# EAGLE board pcb (EAGLE 9.7.0), part 1 of 2
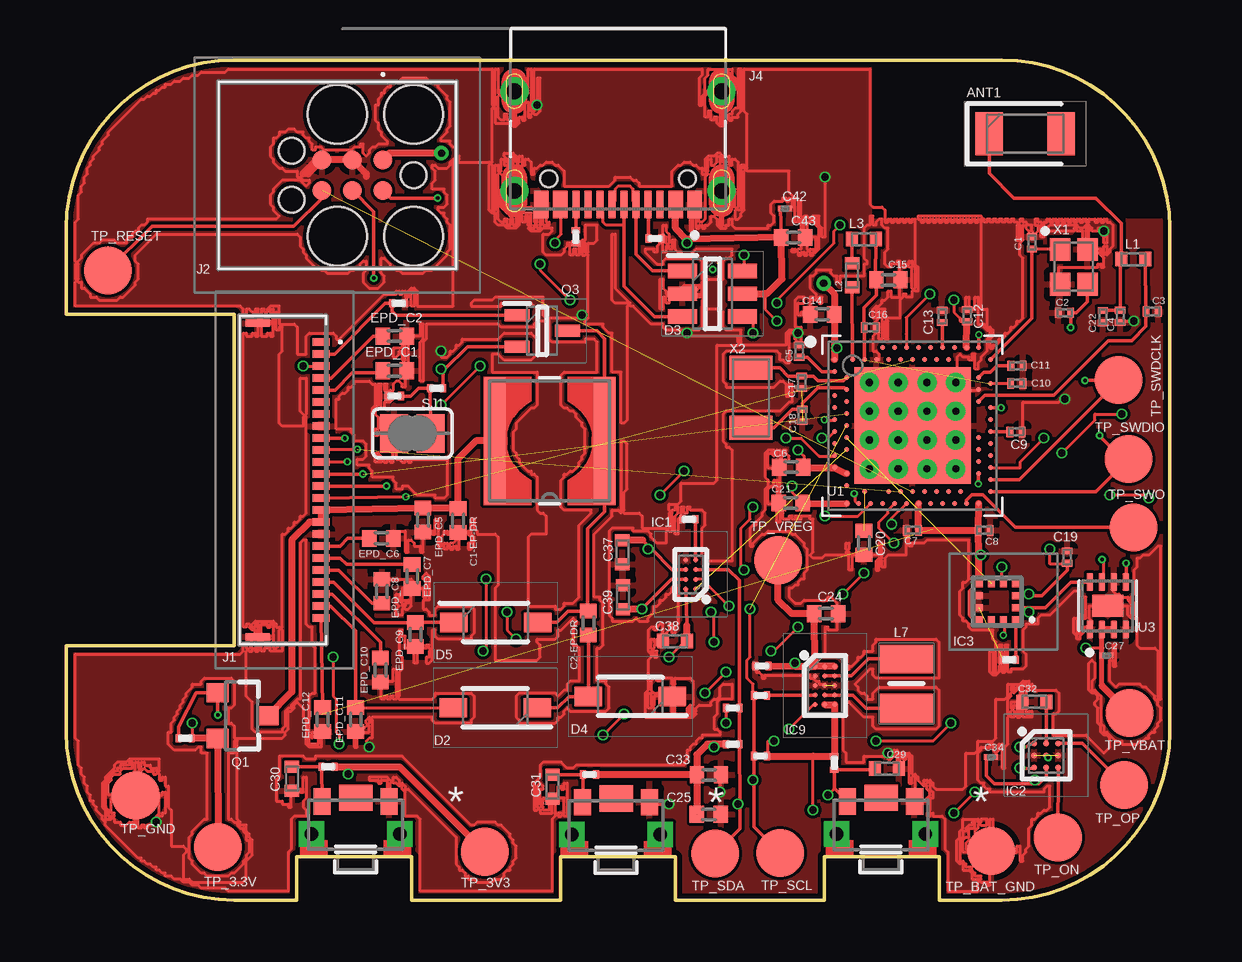
[diagram p0: board, top side]
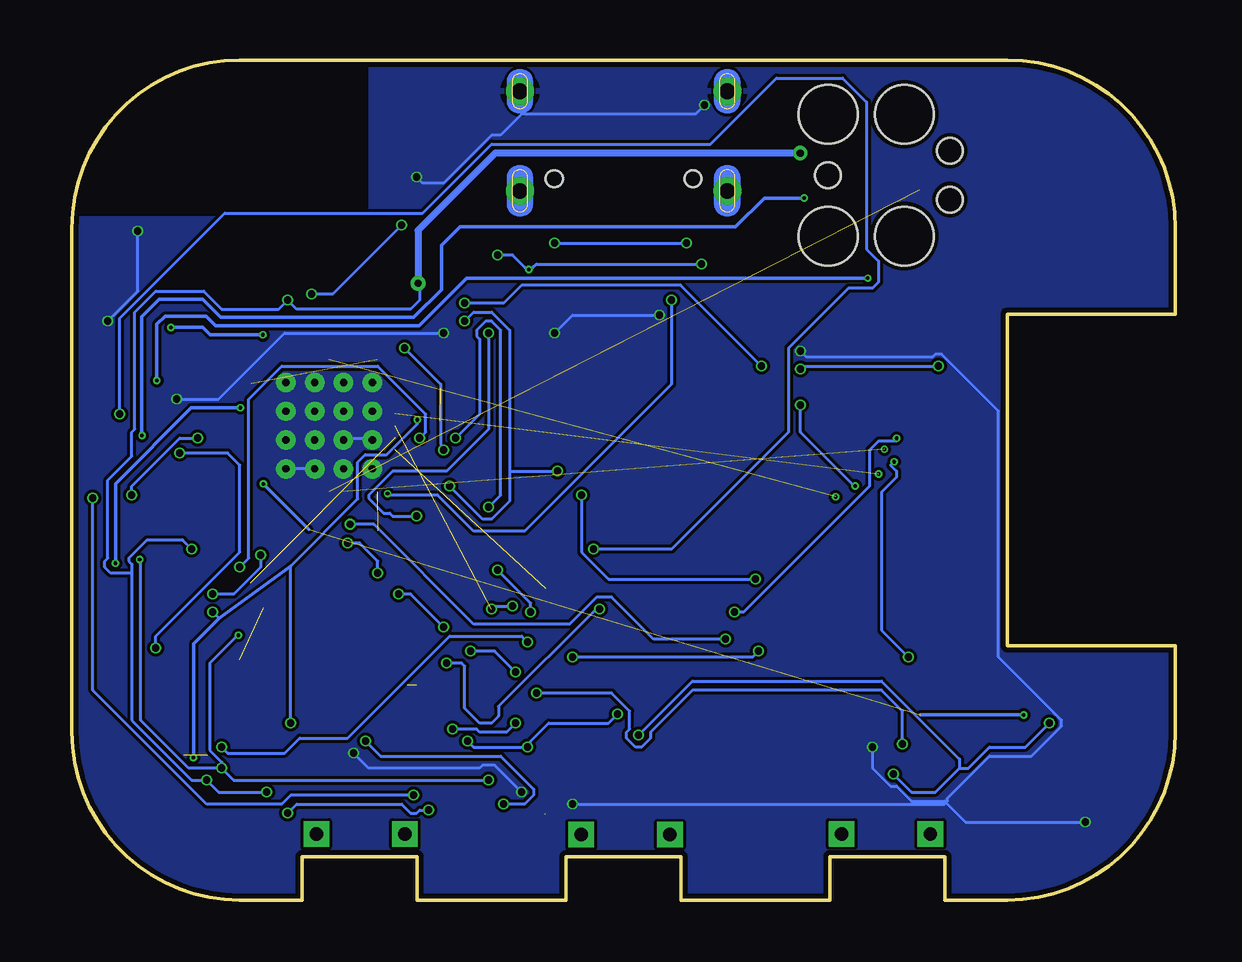
[diagram p1: board, bottom side, seen from below]

Size 46 x 35 mm. Coordinates in mm from the lower left corner, seen from the top.
Outline: 39,0 36.4,0 36.4,1.8 31.6,1.8 31.6,0 25.4,0 25.4,1.8 20.6,1.8 20.6,0 14.4,0 14.4,1.8 9.6,1.8 9.6,0 7,0 arc-90 0,7 0,10.6 7,10.6 7,24.4 0,24.4 0,28 arc-90 7,35 39,35 arc-90 46,28 46,7 arc-90 39,0
Copper layers (1*16): Top 0.035mm / dielectric 1.6mm / Bottom 0.035mm
Design rules "jlcpcb-2layers.dru": minimum track width 5mil, minimum drill 0.3mm, track to track 5mil, track to pad 5mil, pad to pad 5mil, via to via 5mil, smd to smd 5mil, copper to edge 0.2mm, drill to drill 6mil, minimum pad ring 10mil, minimum via ring 3mil, stop-mask expansion 4mil, vias tented up to drill 0mil, thermal gap 10mil

## Footprints (pad centres in the part's own frame; a part is rotated, then mirrored left to right if it is on the bottom)
2450AT18B100E_ANTC3216X140N = smd 1.15 x 1.8: 1 -1.5,0; 2 1.5,0
NORDIC_NRF_3_RESC0201_L = smd 0.28 x 0.43: 1 -0.255,0; 2 0.255,0
PERFECT_0402_0402 = smd 0.6 x 0.7: 1 -0.5,0; 2 0.5,0
GRM011R60J152KE01L_1_0201 = smd 0.35 x 0.25: 1 0,0.275; 2 0,-0.275
GRM011R60J152KE01L_2_CAPC0201X13N = smd 0.22 x 0.23: 1 -0.185,0; 2 0.185,0
NORDIC_NRF_3_RESC0402_L = smd 0.5 x 0.6: 1 -0.5,0; 2 0.5,0
ESP32_C6_LIBRARY_5_SOD3716X135N = smd 1.15 x 0.8: 1 -1.75,0; 2 1.75,0
ESP32_C6_LIBRARY_3_SOT95P280X145-6N = smd 1.2 x 0.6: 1 -1.25,0.95; 2 -1.25,0; 3 -1.25,-0.95; 4 1.25,-0.95; 5 1.25,0; 6 1.25,0.95
BQ25180YBGR_BGA8C40P2X4_100X155X50 = smd 0.2 x 0.2: A1 -0.2,0.6; A2 0.2,0.6; B1 -0.2,0.2; B2 0.2,0.2; C1 -0.2,-0.2; C2 0.2,-0.2; D1 -0.2,-0.6; D2 0.2,-0.6
DRV2605YZFR_BGA9C50P3X3_144X144X62 = smd 0.25 x 0.25: A1 -0.5,0.5; A2 0,0.5; A3 0.5,0.5; B1 -0.5,0; B2 0,0; B3 0.5,0; C1 -0.5,-0.5; C2 0,-0.5; C3 0.5,-0.5
BMA423_BMA423 = smd 0.3 x 0.35: 1 -0.75,-0.775; 2 -0.25,-0.775; 3 0.25,-0.775; 4 0.75,-0.775; 7 0.75,0.775; 8 0.25,0.775; 9 -0.25,0.775; 10 -0.75,0.775 | smd 0.35 x 0.3: 5 0.775,-0.25; 6 0.775,0.25; 11 -0.775,0.25; 12 -0.775,-0.25
RT6160AWSC_BGA15C40P3X5_140X230X60 = smd 0.216 x 0.216: A1 -0.4,0.8; A2 0,0.8; A3 0.4,0.8; B1 -0.4,0.4; B2 0,0.4; B3 0.4,0.4; C1 -0.4,0; C2 0,0; C3 0.4,0; D1 -0.4,-0.4; D2 0,-0.4; D3 0.4,-0.4; E1 -0.4,-0.8; E2 0,-0.8; E3 0.4,-0.8
503480-2400_5034802400 = smd 0.3 x 0.7: 1 -5.75,1.525; 2 -5.25,1.525; 3 -4.75,1.525; 4 -4.25,1.525; 5 -3.75,1.525; 6 -3.25,1.525; 7 -2.75,1.525; 8 -2.25,1.525; 9 -1.75,1.525; 10 -1.25,1.525; 11 -0.75,1.525; 12 -0.25,1.525; 13 0.25,1.525; 14 0.75,1.525; 15 1.25,1.525; 16 1.75,1.525; 17 2.25,1.525; 18 2.75,1.525; 19 3.25,1.525; 20 3.75,1.525; 21 4.25,1.525; 22 4.75,1.525; 23 5.25,1.525; 24 5.75,1.525 | smd 0.3 x 1: MP1 -6.54,-1.125; MP2 6.54,-1.125
TC2030-IDC_TC2030IDC = smd 0.783 x 0.783: 1 -0.953,-0.635; 2 -0.953,0.635; 3 0.317,-0.635; 4 0.317,0.635; 5 1.588,-0.635; 6 1.588,0.635 | hole 2.451: -2.223,-2.54; -2.223,2.54; 0.952,-2.54; 0.952,2.54 | hole 1.067: -2.223,0; 2.857,-1.016; 2.857,1.016
KH-TYPE-C-16P_KINGHELM_KH-TYPE-C-16P = smd 0.6 x 1.15: A1_B12 -3.2,4.725; A4_B9 -2.4,4.725; A9_B4 2.4,4.725; A12_B1 3.2,4.725 | smd 0.3 x 1.15: A5 -1.25,4.725; A6 -0.25,4.725; A7 0.25,4.725; A8 1.25,4.725; B5 1.75,4.725; B6 0.75,4.725; B7 -0.75,4.725; B8 -1.75,4.725 | drill 0.65 pad 1.05: SH1 -4.32,0; SH2 4.32,0; SH3 -4.32,4.15; SH4 4.32,4.15 | hole 0.7: -2.89,3.65; 2.89,3.65
NORDIC_NRF_2_RESC0402_L = smd 0.5 x 0.6: 1 -0.5,0; 2 0.5,0
ESP32_C6_LIBRARY_2_IND_4828-WE-TPC_WRE = smd 0.9 x 5.3: 1 -2.286,0; 2 2.286,0
MLP2016SR47MT0S1_INDC2016X100N = smd 1.2 x 2.2: 1 -1.028,0; 2 1.028,0
ESP32_C6_LIBRARY_4_ESP32_C6_LIBRARY_4_ESP32_C6_LIBRARY_4_ESP32_C6_LIBRARY_4_ESP32_WROVER_SPARKFUN-DISCRETESEMI_SOT23-3 = smd 0.8 x 0.9: 1 -0.95,-1; 2 0.95,-1; 3 0,1.1
ESP32_C6_LIBRARY_6_SOT65P210X110-3N = smd 1.05 x 0.5: 1 -1.05,0.65; 2 -1.05,-0.65; 3 1.05,0
ERA-1AEB3401C_0201 = smd 0.35 x 0.25: 1 0,0.275; 2 0,-0.275
CPF0201D7K68C1_0201 = smd 0.35 x 0.25: 1 0,0.275; 2 0,-0.275
ESP32_C6_LIBRARY_7_JUMPER_SJ = smd 1.168 x 1.6: 1 -0.762,0; 2 0.762,0
2025-10-22_07-23-44_LIBRARY_SW_EVP-AKE31A_PAN = smd 0.711 x 1.092: 1 -1.4,-0.972; 2 1.4,-0.972 | drill 0.559 pad 0.914 square: 3 -1.848,0.381; 4 1.848,0.381 | smd 1.397 x 1.092: 5 0,-1.124
HECTOR_WATCH_1_TP20R = smd 2 x 2: TP 0,0
NORDIC_NRF_4_AQFN50P700X700X85_HS-74N = smd 4.85 x 4.85: P$74 0,0 | drill 0.3 pad 0.6: P$75 -1.8,1.8; P$76 -0.6,1.8; P$77 0.6,1.8; P$78 1.8,1.8; P$79 -1.8,0.6; P$80 -0.6,0.6; P$81 0.6,0.6; P$82 1.8,0.6; P$83 -1.8,-0.6; P$84 -0.6,-0.6; P$85 0.6,-0.6; P$86 1.8,-0.6; P$87 -1.8,-1.8; P$88 -0.6,-1.8; P$89 0.6,-1.8; P$90 1.8,-1.8 | smd 0.2 x 0.2: P$A8 -1.25,3.25; P$A10 -0.75,3.25; P$A12 -0.25,3.25; P$A14 0.25,3.25; P$A16 0.75,3.25; P$A18 1.25,3.25; P$A20 1.75,3.25; P$A22 2.25,3.25; P$A23 2.75,3.25; P$AA24 3.25,-2.25; P$AB2 -2.75,-2.5; P$AC5 -2,-2.75; P$AC9 -1,-2.75; P$AC11 -0.5,-2.75; P$AC13 0,-2.75; P$AC15 0.5,-2.75; P$AC17 1,-2.75; P$AC19 1.5,-2.75; P$AC21 2,-2.75; P$AC24 3.25,-2.75; P$AD2 -2.75,-3.25; P$AD4 -2.25,-3.25; P$AD6 -1.75,-3.25; P$AD8 -1.25,-3.25; P$AD10 -0.75,-3.25; P$AD12 -0.25,-3.25; P$AD14 0.25,-3.25; P$AD16 0.75,-3.25; P$AD18 1.25,-3.25; P$AD20 1.75,-3.25; P$AD22 2.25,-3.25; P$AD23 2.75,-3.25; P$B1 -3.25,2.75; P$B3 -2.5,2.75; P$B5 -2,2.75; P$B7 -1.5,2.75; P$B9 -1,2.75; P$B11 -0.5,2.75; P$B13 0,2.75; P$B15 0.5,2.75; P$B17 1,2.75; P$B19 1.5,2.75; P$B24 3.25,2.75; P$C1 -3.25,2.25; P$D2 -2.75,2; P$D23 2.75,2; P$E24 3.25,1.75; P$F2 -2.75,1.5; P$F23 2.75,1.5; P$G1 -3.25,1.25; P$H2 -2.75,1; P$H23 2.75,1; P$J1 -3.25,0.75; P$J24 3.25,0.75; P$K2 -2.75,0.5; P$L1 -3.25,0.25; P$L24 3.25,0.25; P$M2 -2.75,0; P$N1 -3.25,-0.25; P$N24 3.25,-0.25; P$P2 -2.75,-0.5; P$P23 2.75,-0.5; P$R1 -3.25,-0.75; P$R24 3.25,-0.75; P$T2 -2.75,-1; P$T23 2.75,-1; P$U1 -3.25,-1.25; P$U24 3.25,-1.25; P$V23 2.75,-1.5; P$W1 -3.25,-1.75; P$W24 3.25,-1.75; P$Y2 -2.75,-2; P$Y23 2.75,-2
ESP32_C6_LIBRARY_SON50P200X200X80-9N = smd 0.76 x 0.27: 1 -0.985,0.75; 2 -0.985,0.25; 3 -0.985,-0.25; 4 -0.985,-0.75; 5 0.985,-0.75; 6 0.985,-0.25; 7 0.985,0.25; 8 0.985,0.75 | smd 0.9 x 1.3: 9 0,0
NORDIC_NRF_BT-XTAL_2016_N = smd 0.95 x 0.85: 1 -0.725,-0.575; 2 0.725,-0.575; 3 0.725,0.575; 4 -0.725,0.575
NORDIC_NRF_1_XTAL_3215_N = smd 1 x 1.8: 1 -1.25,0; 2 1.25,0

## Placement (x,y rotation side)
ANT1  2450AT18B100E_2450AT18B100E  [2450AT18B100E_ANTC3216X140N]  39.97,31.93 0 top
C1  12pF  [NORDIC_NRF_3_RESC0201_L]  40.25,27.38 90 top
C1-EP-DR  10uF  [PERFECT_0402_0402]  16.34,15.81 270 top
C2  12pF  [NORDIC_NRF_3_RESC0201_L]  41.61,24.47 180 top
C2-EP-DR  4.7uF/25V  [PERFECT_0402_0402]  21.76,11.53 90 top
C3  1pF  [NORDIC_NRF_3_RESC0201_L]  45.26,24.52 0 top
C4  1pF  [NORDIC_NRF_3_RESC0201_L]  43.93,24.32 270 top
C5  100nF  [NORDIC_NRF_3_RESC0201_L]  30.56,22.87 90 top
C6  4.7uF  [PERFECT_0402_0402]  30.22,18.03 180 top
C7  100nF  [NORDIC_NRF_3_RESC0201_L]  35.27,15.4 180 top
C8  100nF  [NORDIC_NRF_3_RESC0201_L]  38.26,15.4 0 top
C9  820pF N.C.  [NORDIC_NRF_3_RESC0201_L]  39.59,19.51 0 top
C10  N.C.  [NORDIC_NRF_3_RESC0201_L]  39.62,21.53 0 top
C11  100pF  [NORDIC_NRF_3_RESC0201_L]  39.63,22.26 0 top
C12  100nF  [NORDIC_NRF_3_RESC0201_L]  37.55,24.34 90 top
C13  N.C.  [NORDIC_NRF_3_RESC0201_L]  36.51,24.32 90 top
C14  4.7uF  [PERFECT_0402_0402]  31.52,24.4 180 top
C15  1.0uF  [PERFECT_0402_0402]  34.27,25.84 0 top
C16  47nF  [NORDIC_NRF_3_RESC0201_L]  33.51,23.85 0 top
C17  12pF  [NORDIC_NRF_3_RESC0201_L]  30.65,21.57 90 top
C18  12pF  [NORDIC_NRF_3_RESC0201_L]  30.68,20.19 90 top
C19  100nF  [NORDIC_NRF_3_RESC0201_L]  41.72,14.29 90 top
C20  4.7uF  [PERFECT_0402_0402]  33.25,14.88 270 top
C21  4.7uF  [PERFECT_0402_0402]  30.2,16.54 180 top
C22  N.C.  [NORDIC_NRF_3_RESC0201_L]  43.21,24.31 270 top
C23  0.1uF  [GRM011R60J152KE01L_1_0201]  28.99,9.75 90 top
C24  10uF  [PERFECT_0402_0402]  31.67,11.93 180 top
C25  22uF  [PERFECT_0402_0402]  26.78,3.57 0 top
C27  0.1uF  [GRM011R60J152KE01L_2_CAPC0201X13N]  43.36,10.19 180 top
C29  1uF  [NORDIC_NRF_3_RESC0402_L]  34.21,5.47 180 top
C30  1uF  [NORDIC_NRF_3_RESC0402_L]  9.41,5.06 90 top
C31  1uF  [NORDIC_NRF_3_RESC0402_L]  20.27,4.72 90 top
C32  1uF  [NORDIC_NRF_3_RESC0402_L]  40.35,8.26 0 top
C33  22uF  [PERFECT_0402_0402]  26.79,5.22 0 top
C34  0.1uF  [GRM011R60J152KE01L_2_CAPC0201X13N]  38.55,5.96 180 top
C37  1uF  [NORDIC_NRF_3_RESC0402_L]  23.18,14.5 90 top
C38  1uF  [NORDIC_NRF_3_RESC0402_L]  25.37,10.79 0 top
C39  10uF  [NORDIC_NRF_3_RESC0402_L]  23.21,12.61 270 top
C42  0.1uF  [GRM011R60J152KE01L_2_CAPC0201X13N]  29.96,28.81 180 top
C43  4.7uF  [PERFECT_0402_0402]  30.31,27.61 0 top
D2  MBR0530  [ESP32_C6_LIBRARY_5_SOD3716X135N]  17.88,8.01 180 top
D3  USBLC6-2SC6Y  [ESP32_C6_LIBRARY_3_SOT95P280X145-6N]  26.94,25.26 0 top
D4  MBR0530  [ESP32_C6_LIBRARY_5_SOD3716X135N]  23.51,8.48 180 top
D5  MBR0530  [ESP32_C6_LIBRARY_5_SOD3716X135N]  17.9,11.57 0 top
EPD_C1  1uF/50V  [PERFECT_0402_0402]  13.69,22.05 180 top
EPD_C2  1uF/50V  [PERFECT_0402_0402]  13.69,23.49 180 top
EPD_C5  1uF/50V  [PERFECT_0402_0402]  14.87,15.83 90 top
EPD_C6  1uF/50V  [PERFECT_0402_0402]  13.14,15.06 180 top
EPD_C7  1uF/50V  [PERFECT_0402_0402]  14.42,13.48 90 top
EPD_C8  1uF/50V  [PERFECT_0402_0402]  13.16,12.87 270 top
EPD_C9  1uF/50V  [PERFECT_0402_0402]  14.55,11.06 90 top
EPD_C10  1uF/50V  [PERFECT_0402_0402]  13.1,9.58 90 top
EPD_C11  1uF/50V  [PERFECT_0402_0402]  12.06,7.51 90 top
EPD_C12  1uF/50V  [PERFECT_0402_0402]  10.69,7.52 90 top
IC1  BQ25180YBGR  [BQ25180YBGR_BGA8C40P2X4_100X155X50]  26.03,13.56 180 top
IC2  DRV2605YZFR  [DRV2605YZFR_BGA9C50P3X3_144X144X62]  40.85,6.03 0 top
IC3  BMA423  [BMA423_BMA423]  38.81,12.43 90 top
IC9  RT6160AWSC  [RT6160AWSC_BGA15C40P3X5_140X230X60]  31.62,8.94 0 top
J1  503480-2400  [503480-2400_5034802400]  9.1,17.5 270 top
J2  TC2030-IDC  [TC2030-IDC_TC2030IDC]  12.25,30.2 180 top
J4  KH-TYPE-C-16P  [KH-TYPE-C-16P_KINGHELM_KH-TYPE-C-16P]  23,33.7 180 top
L1  3.9nH  [NORDIC_NRF_2_RESC0402_L]  44.47,26.71 180 top
L2  10uH  [NORDIC_NRF_2_RESC0402_L]  32.76,26.02 90 top
L3  15nH  [NORDIC_NRF_2_RESC0402_L]  33.25,27.54 0 top
L5  68 uH  [ESP32_C6_LIBRARY_2_IND_4828-WE-TPC_WRE]  20.15,19.13 180 top
L7  FTC252012SR47MBCA  [MLP2016SR47MT0S1_INDC2016X100N]  35.02,9.02 270 top
Q1  DMG2305UX-7 20V/4.2A/52mΩ/1.4W  [ESP32_C6_LIBRARY_4_ESP32_C6_LIBRARY_4_ESP32_C6_LIBRARY_4_ESP32_C6_LIBRARY_4_ESP32_WROVER_SPARKFUN-DISCRETESEMI_SOT23-3]  7.31,7.68 270 top
Q3  SI1308EDL-T1-GE3  [ESP32_C6_LIBRARY_6_SOT65P210X110-3N]  19.84,23.71 0 top
R1_EP_DR  0.47  [ERA-1AEB3401C_0201]  15.44,21.32 90 top
R1_USB  5K1  [CPF0201D7K68C1_0201]  24.54,27.56 270 top
R2  0  [ERA-1AEB3401C_0201]  27.78,8 270 top
R2_EP_DR  10K  [ERA-1AEB3401C_0201]  13.85,24.86 270 top
R2_USB  5K1  [CPF0201D7K68C1_0201]  21.24,27.63 0 top
R3  0  [CPF0201D7K68C1_0201]  39.31,10.01 90 top
R4  0  [ERA-1AEB3401C_0201]  28.93,8.53 90 top
R5  10k  [CPF0201D7K68C1_0201]  10.92,5.55 90 top
R7  10k  [CPF0201D7K68C1_0201]  32.02,5.71 180 top
R8  10k  [CPF0201D7K68C1_0201]  21.82,5.23 90 top
R9  10K  [ERA-1AEB3401C_0201]  25.95,15.86 90 top
R17  3K3  [ERA-1AEB3401C_0201]  28.93,6 270 top
R18  3K3  [ERA-1AEB3401C_0201]  27.78,6.49 90 top
R_PWR_EPD  10K  [CPF0201D7K68C1_0201]  4.96,6.74 90 top
R_TYPE_SEL  2.2  [ERA-1AEB3401C_0201]  13.68,21 90 top
SJ1  0  [ESP32_C6_LIBRARY_7_JUMPER_SJ]  14.43,19.44 0 top
SW_DN  2025-10-22_07-23-44_LIBRARY_EVP-AKE31ASW_EVP-AKE31A_PAN  [2025-10-22_07-23-44_LIBRARY_SW_EVP-AKE31A_PAN]  33.96,3.13 180 top
SW_ENT  2025-10-22_07-23-44_LIBRARY_EVP-AKE31ASW_EVP-AKE31A_PAN  [2025-10-22_07-23-44_LIBRARY_SW_EVP-AKE31A_PAN]  22.92,3.1 180 top
SW_UP  2025-10-22_07-23-44_LIBRARY_EVP-AKE31ASW_EVP-AKE31A_PAN  [2025-10-22_07-23-44_LIBRARY_SW_EVP-AKE31A_PAN]  12.06,3.14 180 top
TP_3.3V  HECTOR_WATCH_1_TPTP20R  [HECTOR_WATCH_1_TP20R]  6.32,2.2 0 top
TP_3V3  HECTOR_WATCH_1_TPTP20R  [HECTOR_WATCH_1_TP20R]  17.44,2.01 0 top
TP_BAT_GND  HECTOR_WATCH_1_TPTP20R  [HECTOR_WATCH_1_TP20R]  38.56,2.04 0 top
TP_GND  HECTOR_WATCH_1_TPTP20R  [HECTOR_WATCH_1_TP20R]  2.89,4.36 0 top
TP_ON  HECTOR_WATCH_1_TPTP20R  [HECTOR_WATCH_1_TP20R]  41.33,2.6 0 top
TP_OP  HECTOR_WATCH_1_TPTP20R  [HECTOR_WATCH_1_TP20R]  44.09,4.8 0 top
TP_RESET  HECTOR_WATCH_1_TPTP20R  [HECTOR_WATCH_1_TP20R]  1.74,26.23 180 top
TP_SCL  HECTOR_WATCH_1_TPTP20R  [HECTOR_WATCH_1_TP20R]  29.76,1.95 0 top
TP_SDA  HECTOR_WATCH_1_TPTP20R  [HECTOR_WATCH_1_TP20R]  27.06,1.93 0 top
TP_SWDCLK  HECTOR_WATCH_1_TPTP20R  [HECTOR_WATCH_1_TP20R]  43.86,21.66 0 top
TP_SWDIO  HECTOR_WATCH_1_TPTP20R  [HECTOR_WATCH_1_TP20R]  44.28,18.37 0 top
TP_SWO  HECTOR_WATCH_1_TPTP20R  [HECTOR_WATCH_1_TP20R]  44.5,15.53 0 top
TP_VBAT  HECTOR_WATCH_1_TPTP20R  [HECTOR_WATCH_1_TP20R]  44.32,7.78 0 top
TP_VREG  HECTOR_WATCH_1_TPTP20R  [HECTOR_WATCH_1_TP20R]  29.67,14.16 0 top
U1  NRF52840_QF  [NORDIC_NRF_4_AQFN50P700X700X85_HS-74N]  35.28,19.77 0 top
U3  MAX17048G+T10  [ESP32_C6_LIBRARY_SON50P200X200X80-9N]  43.41,12.26 90 top
X1  32MHz  [NORDIC_NRF_BT-XTAL_2016_N]  42,26.38 270 top
X2  32.768kHz  [NORDIC_NRF_1_XTAL_3215_N]  28.54,20.93 270 top

## Library data of the parts
ANT1 = InkTime_v5.lbr; ARROW_PART_NUMBER: 2450AT18B100E; ARROW_PRICE-STOCK: https://www.arrow.com/en/products/2450at18b100e/johanson-dielectrics?utm_currency=USD&region=nac; DESCRIPTION: Antennas 2.45GHz ANTENNA; HEIGHT: 1.4mm; MANUFACTURER_NAME: JOHANSON TECHNOLOGY; MANUFACTURER_PART_NUMBER: 2450AT18B100E; MOUSER_PART_NUMBER: 609-2450AT18B100E; MOUSER_PRICE-STOCK: https://www.mouser.co.uk/ProductDetail/Johanson-Technology/2450AT18B100E?qs=yCnrNFeXz%252Bh5MFsFIXGZGA%3D%3D
C1 C1-EP-DR C2 C2-EP-DR C3-C25 C29-C33 C37-C39 C43 EPD_C1 EPD_C2 EPD_C5-EPD_C12 L1-L3 R1_EP_DR R1_USB R2 R2_EP_DR R2_USB R3-R5 R7-R9 R17 R18 R_PWR_EPD R_TYPE_SEL SJ1 TP_3.3V TP_3V3 TP_BAT_GND TP_GND TP_ON TP_OP TP_RESET TP_SCL TP_SDA TP_SWDCLK TP_SWDIO TP_SWO TP_VBAT TP_VREG U1 X1 X2 = InkTime_v5.lbr
C27 C34 C42 = InkTime_v5.lbr; AVAILABILITY: In Stock; CHECK_PRICES: https://www.snapeda.com/parts/GRM011R60J152KE01L/Murata/view-part/?ref=eda; DESCRIPTION: SMD Capacitor X5R(EIA) with Capacitance: 1500pF Tol. 10%. Rated Voltage: 6.3Vdc; MF: Murata; MP: GRM011R60J152KE01L; PACKAGE: 0201 Murata; PRICE: None; SNAPEDA_LINK: https://www.snapeda.com/parts/GRM011R60J152KE01L/Murata/view-part/?ref=snap
D2 D4 D5 = InkTime_v5.lbr; AVAILABILITY: In Stock; CHECK_PRICES: https://www.snapeda.com/parts/MBR0530/Onsemi/view-part/?ref=eda; DESCRIPTION: Diode Schottky 30 V 500mA Surface Mount SOD-123; MF: ON Semiconductor; MP: MBR0530; PACKAGE: SOD-123-2 ON Semiconductor; PRICE: None; PURCHASE-URL: https://www.snapeda.com/api/url_track_click_mouser/?unipart_id=179458&manufacturer=ON Semiconductor&part_name=MBR0530&search_term=None; SNAPEDA_LINK: https://www.snapeda.com/parts/MBR0530/Onsemi/view-part/?ref=snap
D3 = InkTime_v5.lbr; AVAILABILITY: In Stock; CHECK_PRICES: https://www.snapeda.com/parts/USBLC6-2SC6Y/STMicroelectronics/view-part/?ref=eda; DESCRIPTION: 17V Clamp 5A (8/20µs) Ipp Tvs Diode Surface Mount SOT-23-6; MF: STMicroelectronics; MP: USBLC6-2SC6Y; PACKAGE: SOT-23-6 STMicroelectronics; PRICE: None; SNAPEDA_LINK: https://www.snapeda.com/parts/USBLC6-2SC6Y/STMicroelectronics/view-part/?ref=snap
IC1 = InkTime_v5.lbr; ARROW_PART_NUMBER: BQ25180YBGR; ARROW_PRICE-STOCK: https://www.arrow.com/en/products/bq25180ybgr/texas-instruments?utm_currency=USD&region=nac; DESCRIPTION: Charger IC Lithium Ion/Polymer, Lithium Iron Phosphate 8-DSBGA (1.6x1.1); HEIGHT: 0.5mm; MANUFACTURER_NAME: Texas Instruments; MANUFACTURER_PART_NUMBER: BQ25180YBGR; MOUSER_PART_NUMBER: 595-BQ25180YBGR; MOUSER_PRICE-STOCK: https://www.mouser.co.uk/ProductDetail/Texas-Instruments/BQ25180YBGR?qs=doiCPypUmgEWjAK%252BJAX6Tw%3D%3D
IC2 = InkTime_v5.lbr; ARROW_PART_NUMBER: DRV2605YZFR; ARROW_PRICE-STOCK: https://www.arrow.com/en/products/drv2605yzfr/texas-instruments?region=nac; DESCRIPTION: Haptic Driver for ERM/LRA with Built-In Library and Smart Loop Architecture; HEIGHT: 0.625mm; MANUFACTURER_NAME: Texas Instruments; MANUFACTURER_PART_NUMBER: DRV2605YZFR
IC3 = InkTime_v5.lbr; ARROW_PART_NUMBER: BMA423; ARROW_PRICE-STOCK: https://www.arrow.com/en/products/bma423/bosch; DESCRIPTION: Accelerometers Triaxial low-g 12bit Acceleration Sensor; HEIGHT: 1mm; MANUFACTURER_NAME: BOSCH; MANUFACTURER_PART_NUMBER: BMA423; MOUSER_PART_NUMBER: 262-BMA423; MOUSER_PRICE-STOCK: https://www.mouser.co.uk/ProductDetail/Bosch-Sensortec/BMA423?qs=HXFqYaX1Q2xC%252BSgeGoX3mg%3D%3D
IC9 = InkTime_v5.lbr; DESCRIPTION: Buck-Boost Regulator Positive Output Step-Up/Step-Down I2C DC-DC Controller IC 15-WL-CSP (BSC) (1.4x2.3); HEIGHT: 0.6mm; MANUFACTURER_NAME: RICHTEK; MANUFACTURER_PART_NUMBER: RT6160AWSC; MOUSER_PART_NUMBER: 835-RT6160AWSC; MOUSER_PRICE-STOCK: https://www.mouser.co.uk/ProductDetail/Richtek/RT6160AWSC?qs=amGC7iS6iy%2FLd9PSoixZXQ%3D%3D
J1 = InkTime_v5.lbr; DESCRIPTION: FFC & FPC Connectors 0.5mm FPC RA SMT Dual Contact 24Ckt; HEIGHT: 1.87mm; MANUFACTURER_NAME: Molex; MANUFACTURER_PART_NUMBER: 503480-2400; MOUSER_PART_NUMBER: 538-503480-2400; MOUSER_PRICE-STOCK: https://www.mouser.co.uk/ProductDetail/Molex/503480-2400?qs=OAhjpuo3Vu7efIoxFh9AOw%3D%3D
J2 = InkTime_v5.lbr; DESCRIPTION: CABLE ADAPTER 6 POS; HEIGHT: 19mm; MANUFACTURER_NAME: Tag Connect; MANUFACTURER_PART_NUMBER: TC2030-IDC
J4 = InkTime_v5.lbr; AVAILABILITY: Not in stock; CHECK_PRICES: https://www.snapeda.com/parts/KH-TYPE-C-16P/Kinghelm/view-part/?ref=eda; MF: kinghelm; MP: KH-TYPE-C-16P; PACKAGE: None; PRICE: None; SNAPEDA_LINK: https://www.snapeda.com/parts/KH-TYPE-C-16P/Kinghelm/view-part/?ref=snap
L5 = InkTime_v5.lbr; COPYRIGHT: Copyright (C) 2024 Ultra Librarian. All rights reserved.; MANUFACTURER_PART_NUMBER: 744043680; MFR_NAME: Wurth Electronics
L7 = InkTime_v5.lbr; DESCRIPTION: SMD / SMT Inductors (Coils), L=0.47?H, L x W x T :; HEIGHT: 1mm; JLCPCB: https://jlcpcb.com/partdetail/6763488-FTC252012SR47MBCA/C5832368; MANUFACTURER_NAME: TDK; MANUFACTURER_PART_NUMBER: FTC252012SR47MBCA
Q1 = InkTime_v5.lbr; PROD_ID: TRAN-14388
Q3 = InkTime_v5.lbr; AVAILABILITY: In Stock; CHECK_PRICES: https://www.snapeda.com/parts/SI1308EDL-T1-GE3/Vishay+Siliconix/view-part/?ref=eda; DESCRIPTION: Si1308EDL-T1-GE3 N-channel MOSFET Transistor, 1.5 A, 30 V, 3-Pin SC-70 | Siliconix / Vishay SI1308EDL-T1-GE3; MF: Vishay Siliconix; MP: SI1308EDL-T1-GE3; PACKAGE: SOT-323 Vishay Semiconductor; PRICE: None; PURCHASE-URL: https://www.snapeda.com/api/url_track_click_mouser/?unipart_id=274603&manufacturer=Vishay Siliconix&part_name=SI1308EDL-T1-GE3&search_term=None; SNAPEDA_LINK: https://www.snapeda.com/parts/SI1308EDL-T1-GE3/Vishay+Siliconix/view-part/?ref=snap
SW_DN SW_ENT SW_UP = InkTime_v5.lbr; COPYRIGHT: Copyright (C) 2025 Ultra Librarian. All rights reserved.; DIGI-KEY_PART_NUMBER_1: P123437TR-ND; DIGI-KEY_PART_NUMBER_2: P123437CT-ND; DIGI-KEY_PART_NUMBER_3: P123437DKR-ND; MANUFACTURER_NAME: Panasonic; MANUFACTURER_PART_NUMBER: EVP-AKE31A
U3 = InkTime_v5.lbr; AVAILABILITY: In Stock; CHECK_PRICES: https://www.snapeda.com/parts/MAX17048G+T10/Analog+Devices/view-part/?ref=eda; DESCRIPTION: 3µA 1-Cell/2-Cell Fuel Gauge with ModelGauge; MF: Analog Devices; MP: MAX17048G+T10; PACKAGE: TDFN-8 Maxim; PRICE: None; PURCHASE-URL: https://www.snapeda.com/api/url_track_click_mouser/?unipart_id=329239&manufacturer=Analog Devices&part_name=MAX17048G+T10&search_term=None; SNAPEDA_LINK: https://www.snapeda.com/parts/MAX17048G+T10/Analog+Devices/view-part/?ref=snap

## Nets
3V3: C6.1 C7.1 C8.1 C12.1 C14.1 C19.1 C25.1 C33.1 C34.2 IC2.C2 IC3.3 IC3.7 IC3.10 IC9.E2 IC9.E3 J2.1 Q1.2 R5.2 R7.2 R8.2 R17.1 R18.1 R_PWR_EPD.2 TP_3.3V.TP TP_3V3.TP U1.P$A22 U1.P$AD14 U1.P$AD23 U1.P$B1 U1.P$W1 U1.P$Y2
ALERT: U1.P$J24 U3.5
D+: D3.4 U1.P$AD6
D-: D3.6 U1.P$AD4
DEC1: C5.1 U1.P$C1
DEC3: C11.1 U1.P$D23
DEC4_6: C10.1 C15.1 C16.1 L3.2 U1.P$B5 U1.P$E24
DN: D3.1 J4.A7 J4.B7
DP: D3.3 J4.A6 J4.B6
EPD_3V3: C1-EP-DR.1 EPD_C5.2 J1.15 J1.16 L5.2 Q1.3
EPD_BUSY: J1.9 U1.P$AD12
EPD_CS: J1.12 U1.P$K2
EPD_DC: J1.11 U1.P$AD10
EPD_RST: J1.10 U1.P$AC11
GDR: J1.2 Q3.1 R2_EP_DR.2
GND: C1-EP-DR.2 C1.2 C2.2 C3.2 C4.2 C5.2 C6.2 C7.2 C8.2 C9.2 C10.2 C11.2 C12.2 C13.2 C14.2 C15.2 C16.2 C17.1 C18.1 C19.2 C20.2 C21.2 C22.2 C23.1 C24.1 C25.2 C27.1 C29.1 C30.1 C31.1 C32.1 C33.2 C34.1 C37.1 C38.1 C39.1 C42.1 C43.2 D3.2 D4.1 EPD_C1.1 EPD_C2.1 EPD_C5.1 EPD_C6.1 EPD_C7.1 EPD_C8.1 EPD_C9.1 EPD_C10.1 EPD_C11.1 EPD_C12.1 IC1.D2 IC2.B1 IC2.B3 IC3.8 IC3.9 IC9.B1 IC9.C1 IC9.C2 IC9.C3 J1.8 J1.17 J1.MP1 J1.MP2 J2.3 J2.5 J4.A1_B12 J4.A12_B1 J4.SH1 J4.SH2 J4.SH3 J4.SH4 R1_USB.1 R2_EP_DR.1 R2_USB.2 R3.1 R9.1 R_TYPE_SEL.1 SJ1.1 SW_DN.1 SW_ENT.1 SW_UP.1 TP_BAT_GND.TP TP_GND.TP U1.P$74 U1.P$75 U1.P$76 U1.P$77 U1.P$78 U1.P$79 U1.P$80 U1.P$81 U1.P$82 U1.P$83 U1.P$84 U1.P$85 U1.P$86 U1.P$87 U1.P$88 U1.P$89 U1.P$90 U1.P$B7 U1.P$F23 U3.1 U3.4 U3.6 U3.9 X1.2 X1.4
HAPTIC_EN: IC2.A1 U1.P$U1
IMU_INT1: IC3.5 U1.P$N1
IMU_INT2: IC3.6 U1.P$P2
LX1: IC9.B2 IC9.B3 L7.1
LX2: IC9.D2 IC9.D3 L7.2
MOSI: J1.14 U1.P$B13
N$1: ANT1.1 C4.1 C22.1 L1.2
N$2: IC9.D1 R4.2
N$3: IC1.D1 R9.2
N$4: C2.1 U1.P$A23 X1.3
N$5: IC9.E1 R2.2
N$6: J4.A5 R1_USB.2
N$7: L2.2 L3.1
N$8: IC3.1 R3.2
N$9: C1.1 U1.P$B24 X1.1
N$10: C3.1 L1.1 U1.P$H23
N$11: C32.2 IC2.A2
N$13: C2-EP-DR.1 D2.1 D4.2
N$14: C9.1 U1.P$N24
N$15: R1_EP_DR.1 R_TYPE_SEL.2 SJ1.2
N$16: C2-EP-DR.2 D5.2 L5.1 Q3.3
N$17: EPD_C2.2 J1.4
N$18: EPD_C1.2 J1.5
N$20: C20.1 U1.P$AC5
N$22: L2.1 U1.P$B3
N$26: J4.B5 R2_USB.1
N$30: EPD_C6.2 J1.18
N$31: EPD_C7.2 J1.19
N$32: EPD_C8.2 J1.20
N$34: EPD_C10.2 J1.22
N$35: C13.1 U1.P$A18
N$37: EPD_C12.2 J1.24
OUT+: IC2.A3 TP_OP.TP
OUT-: IC2.C3 TP_ON.TP
P0.00/XL1: C17.2 U1.P$D2 X2.1
P0.01/XL2: C18.2 U1.P$F2 X2.2
P0.04: U1.P$J1
P0.09: U1.P$L24
P0.13: C30.2 R5.1 SW_UP.2
P0.14: C31.2 R8.1 SW_ENT.2
P0.19: U1.P$AC15
P0.20: U1.P$AD16
P0.21: U1.P$AC17
P0.22: U1.P$AD18
P0.23: U1.P$AC19
P0.24: U1.P$AD20
P0.25: U1.P$AC21
P0.26: U1.P$G1
P0.27: U1.P$H2
P0.28: U1.P$B11
P0.29: U1.P$A10
P0.30: U1.P$B9
P0.31: U1.P$A8
P1.01: Q1.1 R_PWR_EPD.1 U1.P$Y23
P1.02: C29.2 R7.1 SW_DN.2 U1.P$W24
P1.03: U1.P$V23
P1.04: U1.P$U24
P1.05: U1.P$T23
P1.06: U1.P$R24
P1.07: U1.P$P23
P1.09: U1.P$R1
P1.10: U1.P$A20
P1.11: U1.P$B19
P1.12: U1.P$B17
P1.13: U1.P$A16
P1.14: U1.P$B15
P1.15: U1.P$A14
PMIC_INT: IC1.A1 U1.P$T2
PO.13: U1.P$AD8
PO.14: U1.P$AC9
PREVGH: D5.1 EPD_C9.2 J1.21
PREVGL: D2.2 EPD_C11.2 J1.23
RESE: J1.3 Q3.2 R1_EP_DR.2
RESET: J2.6 TP_RESET.TP U1.P$AC13
SCK: J1.13 U1.P$A12
SCL: IC1.B1 IC2.C1 IC3.12 R4.1 R17.2 TP_SCL.TP U1.P$M2 U3.7
SDA: IC1.C1 IC2.B2 IC3.2 R2.1 R18.2 TP_SDA.TP U1.P$L1 U3.8
SWDCLK: J2.4 TP_SWDCLK.TP U1.P$AA24
SWDIO: J2.2 TP_SWDIO.TP U1.P$AC24
SWO: TP_SWO.TP U1.P$AD22
VBAT: C27.2 C37.2 IC1.C2 TP_VBAT.TP U3.2 U3.3
VBUS: C21.1 C38.2 C42.2 C43.1 D3.5 IC1.A2 J4.A4_B9 J4.A9_B4 U1.P$AD2
VREG: C23.2 C24.2 C39.2 IC1.B2 IC9.A1 IC9.A2 IC9.A3 TP_VREG.TP

## Tracks (layer width: path | path; a pad name or v marks a point on that pad's centre or on a via)
3V3  (via drill 0.3, 0.3 pad 0.61)  (1 unrouted)
  Top 0.127: v37,25 37,24.5 37.25,24.25 37.25,24.12 37.5,24.12 C12.1 | v30.5,18.75 30.75,18.5 30.75,18.12 C6.1 | v32.12,23 32.02,23 | v5.25,7.38 5.25,6.88 R_PWR_EPD.2 | 11.75,5.55 v11.75,5.25 | 26.25,3.62 C25.1 | v29.5,6.62 29.25,6.62 29.25,6.12 R17.1 | v27,6.38 27,6.49 | v40.12,12.75 40.12,12.68 | v38.12,14.38 38.01,14.37 | IC3.10 38,11.62 37.88,11.62 37.62,11.88 37.62,12.88 37.88,13.12 37.88,13.25 IC3.7 | v40.38,5 40.38,4.85 | v41,14.62 41,14 41.62,14 C19.1 | v31.12,3.75 31.12,6 | v37.88,4.5 v37,3.62 | v23.25,7.75 v22.38,6.88
  Top 0.15: C34.2 38.36,5.17 38.68,4.85 40.38,4.85 40.55,4.85 40.85,5.15 IC2.C2 | C19.1 41.72,13.73 40.67,12.68 40.12,12.68 IC3.3
  Top 0.3: R8.2 26.27,5.23 C33.1 | C33.1 26.3,5.21 | R18.1 27,6.49 26.72,6.49 26.29,6.06 C33.1 | R17.1 31.12,6 32.01,6 R7.2 IC9.E3 IC9.E2 | R5.2 11.75,5.55 13.9,5.55 TP_3V3.TP | R_PWR_EPD.2 Q1.2 TP_3.3V.TP | C6.1 30.73,18.02 U1.P$W1 U1.P$Y2 | U1.P$A22 C12.1 | U1.P$AD23 C8.1 | U1.P$B1 32.02,22.53 32.02,23 C14.1 32.02,25.25 v31.57,25.7 | U1.P$AD14 C7.1 C8.1 | C8.1 38.01,14.37 38.02,13.2 IC3.7 | C8.1 | v15.64,31.12 v15.63,31.12 13.47,31.12 13.21,30.86 J2.1 | 26.3,3.57 | C33.1 26.29,3.58 C25.1
  Bottom 0.127: v31.57,25.7 31.5,25.62 31.5,25 31.88,24.62 36.62,24.62 v37,25 37.38,24.62 39.75,24.62 40.5,25.38 42.5,25.38 43.38,24.5 43.38,19.62 43.5,19.5 43.5,18.5 44.5,17.5 44.5,14.25 44.62,14.12 44.62,13.88 44.38,13.62 43.5,13.62 | v30.5,18.75 30.5,18.88 30.62,19 30.62,21.5 v32.12,23 | v5.25,7.38 6.25,6.38 7.75,6.38 8.62,5.5 9,5.5 | 9,5.5 10,4.5 11,4.5 v11.75,5.25 | v29.5,6.62 29.25,6.38 v27,6.38 26.88,6.5 26.88,6.62 26.12,7.38 23.62,7.38 v23.25,7.75 | v40.12,12.75 39.25,12.75 38.12,13.88 v38.12,14.38 | 43.5,13.62 43.5,14 43.62,14.12 43.62,14.25 42.88,15 41.38,15 v41,14.62 | 43.5,13.62 43.5,7.5 41,5 v40.38,5 39.88,4.5 v37.88,4.5 | v31.12,3.75 31.5,3.75 31.62,3.62 31.88,3.62 32.25,4 36.62,4 v37,3.62 | 9,5.5 9,5.88 12.25,9.12 20.12,9.12 v22.38,6.88
  Bottom 0.3: v15.64,31.12 28.35,31.12 31.57,27.9 v31.57,25.7
ALERT  (via drill 0.15 pad 0.3)
  Top 0.15: v44.18,14.03 44.18,13.26 U3.5 | v38.97,20.51 U1.P$J24
  Bottom 0.15: v38.97,20.51 41.02,20.51 44.18,17.35 v44.18,14.03
D+  (via drill 0.3)
  Top 0.127: v31.62,16 33,16 33.5,16.5 U1.P$AD6 | v28.62,23.62 28.62,24.25 28.25,24.25 D3.4
  Bottom 0.127: v31.62,16 32.62,16 32.75,16.12 33,16.12 33.62,16.75 33.62,16.88 32.62,17.88 30.38,17.88 28.62,19.62 v28.62,23.62
D-  (via drill 0.15 pad 0.3, 0.3)
  Top 0.127: U1.P$AD4 33,16.5 32.88,16.62 32.88,16.88 v32.84,16.93 | v21,25 19.75,26.25 v19.75,26.5 | v28.25,26.88 28.25,26.25 D3.6
  Bottom 0.127: v21,25 21,21.5 27.12,15.38 29.25,15.38 30.75,16.88 32.75,16.88 v32.84,16.93 | v19.75,26.5 26.62,26.5 26.79,26.33 v26.95,26.27 27.12,26.38 27.62,26.88 v28.25,26.88
DEC1
  Top 0.15: C5.1 30.89,22.62 31.49,22.02 U1.P$C1
DEC3
  Top 0.15: C11.1 38.79,22.26 38.52,21.99 38.25,21.99 U1.P$D23
DEC4_6  (1 unrouted)
  Top 0.15: U1.P$B5 33.28,23.85 C16.1 33.26,24.69 33.77,25.2 C15.1 33.73,25.88 L3.2 | C10.1 U1.P$E24
DN
  Top 0.127: J4.A7 22.75,29 22.88,29.12 22.88,29.62 23,29.75 23.5,29.75 23.62,29.62 23.62,29.12 23.75,29 J4.B7
  Top 0.15: D3.1 24.44,26.21 23.75,26.9 J4.B7
DP
  Top 0.127: 23.25,28.12 22.5,28.12 22.38,28.25 22.38,28.75 22.25,28.88 J4.B6
  Top 0.15: D3.3 24.52,24.31 23.25,25.58 23.25,28.12 J4.A6
EPD_3V3
  Top 0.3: Q1.3 9.4,8.67 9.4,15.01 10.14,15.75 J1.16 J1.15 EPD_C5.2 16.32,16.33 C1-EP-DR.1 16.34,18.39 17.07,19.13 L5.2
EPD_BUSY  (via drill 0.15 pad 0.3, 0.3)
  Top 0.127: v34.41,15.65 34.41,15.9 35,16.5 U1.P$AD12 | v18.75,10.88 18.38,11.25 v18.38,12
  Top 0.15: J1.9 v11.62,19.24
  Bottom 0.127: v34.41,15.65 33.41,15.65 29.25,11.5 25.25,11.5 24.12,12.62 23.5,12.62 21.75,10.88 v18.75,10.88 | v18.38,12 18,12 12.75,17.25 12.75,18.75 12.38,19.12 11.62,19.12 v11.62,19.24
EPD_CS  (via drill 0.15 pad 0.3)  (1 unrouted)
  Top 0.15: J1.12 v12.37,17.75
EPD_DC  (via drill 0.15 pad 0.3, 0.3)
  Top 0.127: v34.5,14.88 33.88,15.5 33.88,15.75 34.25,16.12 34.25,16.25 34.5,16.5 U1.P$AD10 | v32.38,12.75 v33.25,13.62 | v30.5,11.38 29.5,10.38 v29.38,10.38 | v26.62,8.62 v27.5,9.5 | v11.38,6.5 11.38,6.88 11.25,7 11.25,8.38 11.12,8.5 v11.12,10.12
  Top 0.15: J1.11 v11.72,18.26
  Bottom 0.127: v34.5,14.88 34,14.88 33.25,14.12 v33.25,13.62 | v32.38,12.75 31.88,12.75 v30.5,11.38 | v29.38,10.38 28.38,10.38 v27.5,9.5 | v26.62,8.62 23.5,8.62 22.75,7.88 22.75,7.12 22.88,7 22.88,6.75 22.5,6.38 22.25,6.38 21.88,6.75 21.88,7 20.12,8.75 12.25,8.75 11.38,7.88 v11.38,6.5 | v11.12,10.12 12.25,11.25 12.25,17 11.62,17.62 11.62,17.88 11.88,18.12 11.75,18.25 v11.72,18.26
EPD_RST  (via drill 0.15 pad 0.3)  (1 unrouted)
  Top 0.15: v12.13,18.78 10.64,18.76 J1.10
GDR
  Top 0.15: Q3.1 13.75,24.36 13.58,24.54 R2_EP_DR.2 13.29,24.86 11.18,22.75 J1.2
GND  (via drill 0.3)  (4 unrouted)
  Top 0.127: U1.P$89 35.88,18 35.88,19.12 U1.P$85 35.88,19.25 35.88,19.75 | U1.P$77 35.88,21.5 U1.P$81 35.88,20.25 35.88,19.75 | 35.88,19.75 35.38,19.75 U1.P$74 35.25,19.75 34.62,19.75 | U1.P$87 33.5,18 33.5,19.12 U1.P$83 33.5,19.25 33.5,20.25 U1.P$79 33.5,20.38 33.5,21.5 U1.P$75 | U1.P$88 34.62,18 34.62,19.12 U1.P$84 34.62,19.25 34.62,19.75 | U1.P$76 34.62,21.5 34.62,20.38 U1.P$80 34.62,20.25 34.62,19.75 | 37.12,21.25 38,21.25 U1.P$F23 | 37.12,21.25 37.12,20.38 U1.P$82 37.12,20.25 37.12,19.25 U1.P$86 37.12,19.12 37.12,18 U1.P$90 | 37.12,21.25 37.12,21.5 U1.P$78 37.12,21.62 37.12,22.62 37.25,22.75 37.38,22.62 37.62,22.62 37.62,22.5 37.75,22.5 37.75,22.75 37.88,22.75 37.88,22.12 38,22.12 38,22.38 38.12,22.5 38.12,22.62 38.38,22.88 38.38,23.38 38.5,23.5 38.5,23.75 38.38,23.75 38.25,23.88 38.25,24 38,24 38,25.12 37.88,25.12 37.88,24.62 37.75,24.62 37.62,24.75 37.62,25.12 37.5,25.12 37.5,24.75 37.38,24.62 37.5,24.5 C12.2 | U1.P$B7 33.88,22.5 33.88,22.75 33.75,22.88 33.62,22.88 33.62,23.5 33.75,23.62 33.88,23.62 33.88,23.38 34,23.38 34,24.5 33.88,24.5 33.88,24.25 33.75,24.12 33.75,24 33.88,24 33.88,23.88 C16.2 | IC9.C2 31.62,9 31.38,9 31.38,9.12 31.25,9.12 31.12,9.25 31,9.25 31,9.38 30.88,9.38 30.88,8.88 30.75,8.88 30.75,9.38 29.12,9.38 29.12,9.25 29,9.25 29,9.38 28.88,9.5 28.75,9.5 28.75,9.75 C23.1 | v3.75,3.25 3.88,3.38 3.75,3.5 3.88,3.62 3.88,4.25 3.25,4.25 3.25,4.38 4,4.38 4,4.5 4.12,4.5 4.12,3.62 4,3.62 4,3.5 3.88,3.5 3.62,3.25 3.62,3.12 3.38,3.12 3.38,3 3.25,3 3.25,3.12 3.12,3.12 3.12,3 3,3 3,4.12 3.12,4.25 3.12,4.38 3,4.5 3,5.38 3.12,5.38 3.25,5.5 3.38,5.38 3.62,5.38 3.62,5.25 3.75,5.25 3.88,5.38 3.88,5.88 2.62,5.88 2.5,5.75 2.12,5.75 2,5.62 2,5.5 1.62,5.12 1.62,5 1.5,4.88 1.5,3.88 1.62,3.75 1.62,3.38 1.88,3.38 2,3.5 2,3.62 1.88,3.62 1.88,4.25 2.62,4.25 2.62,4.38 1.75,4.38 1.75,4.88 1.88,5 1.88,5.12 2,5.25 2.25,5.25 2.25,5.38 2.38,5.5 2.75,5.5 2.75,5.75 2.62,5.75 2.62,5.62 2.25,5.62 2.25,5.5 2.12,5.5 2.12,5.38 2,5.38 1.75,5.12 1.75,5 1.62,4.88 1.62,3.88 1.75,3.75 1.75,3.5 1.88,3.5 2,3.38 2,3.25 2.25,3.25 2.25,3.12 2.5,3.12 2.62,3.25 2.75,3.25 2.75,3 2.88,3 2.88,4.12 2.75,4.25 2.75,4.38 2.88,4.5 2.88,5.75 3,5.75 3,5.5 3.12,5.5 3.12,5.75 3.25,5.75 3.25,5.62 3.5,5.62 3.5,5.5 3.75,5.5 3.75,5.38 3.88,5.25 3.88,5 4,5 4,5.12 4.12,5.12 4.12,4.75 4.25,4.75 4.25,3.88 4.38,3.75 4.38,2.25 4.88,2.25 5,2.12 5,2 4.88,1.88 4.88,0.88 5.12,0.88 5.25,0.75 7.38,0.75 7.5,0.88 7.5,1.62 7.75,1.88 7.75,2.5 7.62,2.62 7.62,2.75 7.5,2.88 7.5,3.12 7.25,3.12 7.25,3.25 7.12,3.38 7.12,6.62 7,6.62 7,6.12 6.75,6.12 6.75,3.38 6.88,3.38 7,3.25 7.12,3.25 7.12,3.12 7.25,3 7.38,3 7.38,2.88 7.5,2.75 7.5,2.5 7.62,2.5 7.62,2 7.5,1.88 7.5,1.75 7.38,1.62 7.38,1.5 7,1.12 6.88,1.12 6.75,1 5.88,1 5.75,1.12 5.62,1.12 5.25,1.5 5.25,1.62 5.12,1.75 5.12,2.62 5.25,2.75 5.25,2.88 5.75,3.38 5.88,3.38 5.88,6.12 5.62,6.12 5.62,6.38 5.5,6.38 5.38,6.25 4.5,6.25 4.25,6.5 4.25,7 4.38,7 4.38,7.38 4.5,7.5 4.5,7.62 4.62,7.75 4.62,7.88 4.75,8 4.75,8.12 4.88,8.25 4.88,8.38 5,8.5 5,8.62 5.25,8.88 5.25,9 5.62,9 5.62,9.12 5.75,9.25 6.88,9.25 7,9.12 7,8.12 6.88,8 6.75,8 6.75,7.38 6.88,7.38 7,7.25 7,6.75 9,6.75 9.12,6.88 9.12,7 9.25,7.12 9.25,7.88 9.38,7.88 9.5,8 9.5,8.12 9.62,8.25 9.88,8 9.88,7.62 10,7.5 10,7 10.25,6.75 10.38,6.88 10.5,6.88 10.5,6.5 10.12,6.5 10.12,6.75 10.25,6.88 10.25,7 10.5,7 10.62,6.88 10.62,6.38 10.12,6.38 10,6.5 10,6.88 10.12,7 10.12,8.5 10.25,8.62 10.38,8.62 10.38,10.5 10.25,10.62 10.25,11.38 10.12,11.38 10,11.5 10,15 9.88,15 9.75,14.88 9.75,8.38 9.62,8.38 9.38,8.12 9.38,8 9.25,8 9.12,7.88 9.12,7.25 9,7.12 9,7 7.88,7 7.75,7.12 7.75,8.25 7.5,8.5 7.5,10.38 7.75,10.62 7.75,11 7.88,11.12 7.88,11.25 7.75,11.25 7.62,11.38 7.88,11.62 8.62,11.62 8.75,11.5 8.75,11.38 8.88,11.38 9,11.25 9,10.38 8.5,10.38 8.5,10.5 8.25,10.5 8.25,10.38 8.12,10.38 8.12,10.75 8.25,10.88 8.5,10.88 8.5,11 8.25,11 8.12,11.12 8.12,11.5 8.38,11.5 8.38,11.38 8.5,11.38 8.5,11.5 8.62,11.5 8.62,10.5 8.75,10.5 8.88,10.62 8.88,11.25 9,11.38 9,15.25 9.12,15.25 9.25,15.38 9.25,15.5 9.38,15.5 9.5,15.62 9.5,15.75 9.62,15.75 9.75,15.88 9.75,16 9.88,16 10,16.12 10,20.12 9.75,20.38 9.75,21.75 10,21.75 10,20.25 9.88,20.12 9.88,19.75 9,19.75 8.88,19.88 8.88,22.75 9,22.88 9,23.88 8.88,23.88 8.88,23.75 8.75,23.75 8.75,24.38 8.88,24.5 8.88,24.75 8.5,24.75 8.38,24.62 8.38,24.5 8.25,24.5 8.25,24.62 8.12,24.62 8.12,24.25 8.25,24.12 8.5,24.12 8.5,24 8.25,24 8.12,23.88 8.12,23.5 8.38,23.5 8.38,23.62 8.5,23.62 8.5,23.5 8.62,23.5 8.62,24.38 8.5,24.5 8.5,24.62 8.62,24.62 8.62,24.5 8.75,24.5 8.88,24.38 8.88,24 9.5,24 9.62,23.88 9.62,22.75 10,22.75 10,23.5 10.12,23.62 11.12,23.62 11.25,23.5 11.25,23.38 11.38,23.38 13.25,25.25 13.75,25.25 13.75,25.38 13.88,25.38 13.88,25.25 14,25.25 14,25.38 14.12,25.38 14.12,25.12 14.25,25.12 14.25,25.38 14.38,25.5 14.5,25.5 14.62,25.38 14.5,25.25 14.5,24.75 14.38,24.75 14.38,25.38 14.5,25.38 14.62,25.25 14.62,24.75 16.12,24.75 16.12,30.75 16.25,30.75 16.38,30.88 16.38,31 16.25,31.12 16.25,31.38 16.12,31.38 16,31.5 16,31.62 15.62,31.62 15.62,31.75 15.88,32 15.88,32.12 16,32.25 16,33.25 15.88,33.38 15.88,33.5 15.5,33.88 15.5,34 15.38,34 15.25,34.12 15.12,34.12 15,34.25 14,34.25 13.88,34.12 13.62,34.12 13.5,34 13.5,33.88 13.38,33.88 13.25,33.75 13.25,33.62 13.12,33.62 13.12,33.5 13,33.38 13,33.12 12.88,33.12 12.88,32.5 13,32.38 13,32.12 13.12,32 13.12,31.88 13.38,31.62 13.38,31.5 13,31.5 12.88,31.38 12.75,31.38 12.62,31.25 12.62,31.12 12.5,31 12.38,31.12 12.38,31.5 12.25,31.5 12.25,31.38 12,31.38 11.88,31.25 10.75,31.25 10.62,31.38 10.38,31.38 10.38,31.25 10.25,31.25 10.25,31.5 10.12,31.62 10.12,31.75 10,31.75 9.88,31.88 9.88,32 9.62,32 9.5,32.12 9.25,32.12 9.12,32 8.88,32 8.88,31.88 8.75,31.75 8.62,31.75 8.62,31.5 8.5,31.38 8.5,31 8.62,30.88 8.62,30.75 8.88,30.5 9,30.5 9.12,30.38 9.62,30.38 9.62,30.12 9.75,30.12 9.88,30 10.12,30 10.12,29.88 10,29.75 9.75,30 9,30 8.62,29.62 8.62,29.5 8.5,29.38 8.5,29 8.62,28.88 8.62,28.75 8.88,28.5 8.75,28.38 3.38,28.38 3.38,28.25 3.25,28.12 3.12,28.12 3,28 3,27.88 2.88,27.88 2.75,27.75 2.75,27.62 2.62,27.62 2.5,27.5 2.5,27.38 2.12,27.38 2,27.5 1.5,27.5 1.38,27.38 1.12,27.38 0.62,26.88 0.62,26.75 0.38,26.5 0.38,25.88 0.5,25.75 0.62,25.75 0.62,25.5 0.75,25.5 1,25.25 1,25.12 1.25,25.12 1.38,25 2.12,25 2.25,25.12 2.38,25.12 2.88,25.62 2.88,25.75 3,25.88 3,26.5 2.88,26.62 2.88,26.88 3.75,27.75 9.62,27.75 9.75,27.62 9.75,27.25 9.88,27.12 9.88,27 10,26.88 10,26.75 10.38,26.38 10.5,26.38 10.62,26.25 10.75,26.25 10.88,26.12 11.75,26.12 11.88,26.25 12,26.25 12.12,26.38 12.25,26.38 12.25,26.5 12.38,26.62 12.5,26.62 12.5,26.25 12.38,26.12 12.38,25.75 12.62,25.5 13,25.5 13.25,25.75 13.25,26 13.12,26.12 13.12,26.75 13.25,26.75 13.5,26.5 13.5,26.38 13.62,26.38 13.75,26.25 13.88,26.25 14,26.12 14.88,26.12 15,26.25 15.25,26.25 15.88,26.88 15.88,27 16,27.12 16,28.12 15.88,28.25 15.88,28.38 15.75,28.5 15.75,28.62 15.62,28.62 15.5,28.75 15.5,28.88 15.75,28.88 15.88,29 15.88,29.38 15.75,29.5 15.75,29.62 15.25,29.62 15.25,29.88 15.38,30 15.38,30.38 15.25,30.5 15.25,30.62 15.38,30.62 15.5,30.5 15.88,30.5 16,30.62 16,30.75 16.12,30.88 16.25,30.88 16.38,30.75 17.62,30.75 17.75,30.62 17.75,28.75 17.88,28.75 17.88,30.62 18,30.62 18,30.38 18.25,30.12 18.25,29.75 18.5,29.75 18.5,30.62 18.38,30.75 18.38,30.88 18.25,31 18.25,31.12 18.62,31.12 18.75,31 18.75,30.75 19,30.5 19,30.38 19.12,30.25 19.12,28.88 19.38,28.88 19.5,28.75 19.5,28.25 19.62,28.25 19.62,29.12 19.88,29.12 20,29 20,28.25 20.12,28.25 20.12,28.12 19.88,28.12 19.88,28.75 19.75,28.75 19.75,28 19.62,28 19.62,28.12 19.5,28.12 19.5,28 19.38,28 19.25,28.12 19.25,28.5 19.12,28.5 19.12,28.25 19,28.25 19,28.5 18.88,28.62 18.88,29.38 18.75,29.38 18.75,28.12 18.62,28.12 18.62,28.38 18.5,28.5 18.5,28.75 18.25,28.75 18.12,28.88 18.12,29.62 18.25,29.62 18.25,29.5 18.38,29.5 18.38,29.62 18.5,29.62 18.5,29.5 18.62,29.38 18.62,28.5 18.5,28.38 18.5,28.12 18.38,28.12 18.38,28.38 18.25,28.38 18.25,28.25 18.12,28.25 18,28.38 18,30.25 18.12,30.38 18.12,30.88 18.25,30.88 18.25,30.62 18.38,30.62 18.5,30.75 18.5,31 18.62,31 18.62,29.75 18.75,29.75 18.75,30.62 18.88,30.75 18.88,31 19,31 19,30.62 19.12,30.62 19.12,30.88 19.25,30.88 19.38,30.75 19.38,30.25 19.5,30.25 19.5,30.5 19.62,30.5 19.75,30.62 19.88,30.62 20,30.75 20.25,30.75 20.38,30.62 20.5,30.62 20.75,30.38 20.75,29.75 22.62,29.75 22.88,30 22.88,30.12 23.5,30.12 23.62,30 23.75,30 23.88,29.88 23.88,29.75 25.25,29.75 25.25,30.38 25.5,30.62 25.62,30.62 25.75,30.75 26,30.75 26.12,30.62 26.25,30.62 26.38,30.5 26.5,30.5 26.5,30.25 26.62,30.25 26.75,30.38 26.75,30.88 26.88,30.88 26.88,30.62 27,30.62 27.12,30.75 27.12,31 27.25,31 27.25,29.75 27.12,29.62 27.12,29.5 27.25,29.38 27.25,28.12 27.38,28.12 27.38,29.38 27.5,29.5 27.5,29.62 27.38,29.75 27.38,30.62 27.5,30.75 27.5,31 27.62,31 27.62,30.62 27.75,30.62 27.75,30.88 27.88,30.88 28,30.75 28,28.88 27.88,28.75 27.88,28.38 28,28.38 28.12,28.5 28.12,28.62 28.25,28.75 28.25,30.38 28.38,30.5 28.38,32.75 28.25,32.88 28.25,34.62 33.5,34.62 33.5,29 33.62,28.88 34,28.88 34.12,28.75 34.12,28.25 34.25,28.25 34.25,28.38 34.38,28.38 34.38,28.25 34.5,28.25 34.5,28.38 34.62,28.38 34.62,28.25 34.75,28.25 34.75,28.38 34.88,28.38 34.88,28.25 35,28.25 35,28.38 35.12,28.38 35.12,28.25 35.25,28.25 35.25,28.38 35.38,28.38 35.38,26.5 35.5,26.38 35.5,25.38 35.38,25.38 35.25,25.5 35.25,26.38 35.12,26.38 35,26.5 34.88,26.5 34.88,26.38 35,26.38 35.12,26.5 35.12,26.62 35.25,26.62 35.25,26.5 35.38,26.38 35.38,25.5 35.25,25.38 35.25,25.12 35,25.12 35,25.25 34.88,25.25 34.88,25.12 34.75,25 34.75,24.25 34.25,24.25 34.12,24.12 34.12,23.38 34.25,23.38 34.25,24.12 34.12,24.25 34.12,24.62 33.75,24.62 33.75,24.25 33.62,24.25 33.62,24.62 33.75,24.75 33.88,24.75 34,24.88 34,25 34.12,25 34.25,25.12 34.25,25.38 34.38,25.38 34.38,25.12 34.75,25.12 34.75,25.62 34.88,25.62 35,25.75 35,25.88 34.88,26 34.75,26 34.75,26.62 34.62,26.62 34.62,26.5 34.38,26.5 34.38,26.38 34.25,26.38 34.12,26.5 34.12,27 34.25,27.12 34.25,28 34.12,28 34,28.12 34,28.38 33.88,28.38 33.75,28.25 33.75,28.12 33.62,28.12 33.62,28.5 33.5,28.5 33.5,28.12 33.38,28.12 33.25,28 33.25,26.75 33.38,26.62 33.38,26.5 33.25,26.5 33.25,26 32.25,26 32.25,25.75 32.12,25.75 32.12,26 32,26 31.88,26.12 31.88,26.25 31.25,26.25 31.25,26.12 31.12,26 31,26 31,25.5 31.25,25.25 31.25,25.12 31.38,25 31.38,24.88 31.5,24.88 31.5,25.12 31.38,25.12 31.25,25 31.12,25 31.12,25.12 31,25.12 31,24.62 30.88,24.5 30.88,24.38 30.75,24.38 30.75,24.5 30.62,24.5 30.62,24.38 30.5,24.38 30.5,24.88 30.75,24.88 30.75,25.12 30.5,25.12 30.38,25 30.38,23.88 30.62,23.88 30.62,23.25 30.5,23.25 30.38,23.38 30.38,23.62 30.12,23.62 30.12,22.38 30,22.38 29.88,22.5 29.75,22.5 29.75,22.75 29.62,22.88 27.5,22.88 27.38,22.75 27.38,21.62 27.5,21.5 27.5,21.38 29.5,21.38 29.75,21.62 29.88,21.62 30,21.5 30,21 30.12,21 30.12,21.5 30.25,21.5 30.25,20.75 30.12,20.75 29.75,20.38 27.5,20.38 27.38,20.25 27.38,19.12 27.5,19 27.5,18.88 27.62,18.88 27.75,18.75 27.75,14.12 26.62,14.12 26.62,14.25 26.5,14.38 26.5,15.5 26.62,15.62 26.62,16.12 26.5,16.25 26,16.25 26,16.38 25.88,16.38 25.88,16.12 25.75,16.12 25.75,16.38 25.62,16.38 25.62,16 25.5,15.88 25.5,15.25 25.38,15.25 25.38,16 25.5,16.12 25.5,16.38 25.38,16.38 25.38,16.25 25.25,16.25 25.12,16.12 25.12,15.5 25,15.38 25,14.88 24.62,14.88 24.38,15.12 24.38,15.25 24.25,15.38 23.62,15.38 23.62,15.5 22.75,15.5 22.62,15.38 22.62,11.88 22.75,11.75 22.75,11.62 23.62,11.62 23.75,11.75 23.88,11.62 24.25,11.62 24.25,11.75 24.5,12 24.5,12.25 24.62,12.25 24.75,12.38 24.75,12.5 24.88,12.5 25,12.62 25,12.75 25.12,12.75 25.25,12.88 25.25,13 25.5,13 25.5,11.5 25.38,11.38 25.38,11.12 25.25,11.12 25.25,11.5 25.12,11.5 25.12,11.25 25,11.12 25,10.62 24.5,10.62 24.5,10.5 24.38,10.38 24.5,10.25 24.5,10.12 24.62,10.12 24.62,10.38 24.5,10.38 24.38,10.5 24.38,10.88 24.5,10.88 24.5,10.75 24.62,10.75 24.62,10.88 24.75,11 24.88,11 24.88,11.5 24.75,11.5 24.62,11.38 24.62,11.25 24.5,11.25 24.5,11.38 24.38,11.38 24.25,11.25 24.25,10.38 24.38,10.25 24.38,10.12 24.25,10 24.25,8.75 24.12,8.62 24.12,7.62 26.12,7.62 26.25,7.75 26.12,7.88 26.12,8 26,8.12 25.88,8 25.88,7.75 25.38,7.75 25.38,8.25 25.5,8.38 25.5,8.5 25.38,8.62 25.38,8.88 25.25,9 25.25,9.25 24.75,9.25 24.75,9.12 24.62,9.12 24.62,9.25 24.5,9.25 24.38,9.12 24.38,8.75 24.5,8.62 24.62,8.62 24.62,8.5 24.5,8.5 24.5,8.12 24.38,8 24.25,8 24.25,8.62 24.38,8.62 24.38,8.12 24.5,8 24.5,7.75 25.25,7.75 25.25,8.25 25.12,8.38 25.12,8.5 25.25,8.62 25.25,8.88 25.38,9 25.38,9.25 26,9.25 26.12,9.12 26.12,8.12 26,8 26,7.75 26.12,7.75 26.25,7.88 26.25,8 26.38,8.12 26.88,8.12 26.88,8.25 27,8.38 27.12,8.38 27.25,8.5 27.25,8.88 27.38,9 27.75,9 27.75,8.38 27.25,8.38 27.12,8.25 27.12,7.75 27,7.62 27,7.12 27.12,7.12 27.25,7 27.25,6.88 26.5,6.88 26.5,6.75 26.38,6.75 26.25,6.62 26.25,6.5 26.12,6.5 26,6.38 26,6.25 25.88,6.25 25.88,5.88 25.75,5.75 25.75,5.62 21.25,5.62 21.12,5.5 20.88,5.5 20.62,5.75 19.88,5.75 19.75,5.62 19.75,5.12 19.5,4.88 19.5,3.75 19.62,3.75 19.88,4 19.88,4.25 20,4.25 20,4.12 20.12,4 20.12,3.75 19.88,3.75 19.88,3.88 19.75,4 19.75,4.62 19.88,4.62 19.88,4.75 19.75,4.88 19.62,4.75 19.62,3.88 19.75,3.75 19.75,3.62 20.25,3.62 20.25,4 20.12,4.12 20.12,4.25 20.25,4.38 20.38,4.38 20.5,4.5 20.5,4.75 20.62,4.75 20.62,4.62 20.75,4.62 20.75,4.88 20.88,4.88 20.88,3.5 20.75,3.5 20.62,3.62 20.5,3.62 20.5,3.5 20.62,3.5 20.75,3.62 20.75,4.25 20.5,4.25 20.5,4.12 20.38,4 20.38,3.5 20.25,3.38 20.25,0.38 14.75,0.38 14.75,3.38 14.62,3.5 14.12,3.5 14.12,4.5 14,4.62 14,4.75 13.88,4.75 13.75,4.88 13.62,4.88 13.38,5.12 12.62,5.12 12.62,5 13,5 13,4.88 13.12,4.88 13.12,5 13.38,5 13.38,4.25 13.25,4.12 13.25,4 13.38,3.88 13.5,3.88 13.62,4 13.62,4.12 13.5,4.25 13.5,4.88 13.62,5 13.62,5.12 13.75,5.12 13.88,5 13.88,4.88 14,4.88 14.12,4.75 14.12,4.62 14.25,4.62 16.25,2.62 16.25,1.5 16.38,1.38 16.38,1.25 16.5,1.25 16.62,1.12 16.62,1 16.75,1 16.75,0.88 17,0.88 17.12,0.75 17.75,0.75 17.88,0.88 18.12,0.88 18.25,1 18.25,1.12 18.38,1.25 18.5,1.25 18.5,1.38 18.62,1.5 18.62,1.62 18.75,1.75 18.75,2.25 18.62,2.38 18.62,2.5 18.5,2.62 18.5,2.75 18.12,3.12 18,3.12 17.88,3.25 17.12,3.25 17,3.12 16.88,3.12 14,6 10.38,6 10.38,5.88 10,5.88 9.88,6 8.88,6 8.88,5.12 8.75,5 8.75,4.12 9,4.12 9,4 9.25,4 9.25,3.88 9.38,3.88 9.38,4.38 9.5,4.38 9.62,4.5 9.62,4.62 9.75,4.62 9.75,4.5 9.88,4.5 9.88,5.12 10,5.12 10,4.25 9.88,4.12 9.88,3.88 10,3.75 10,3.5 9.5,3.5 9.38,3.38 9.38,2.12 9.25,2 9.25,0.38 6.75,0.38 6.62,0.5 5.62,0.5 5.5,0.62 5.25,0.62 5.12,0.75 4.88,0.75 4.75,0.88 4.5,0.88 4.38,1 4.12,1 4.12,1.12 4,1.12 3.88,1.25 3.75,1.25 3.75,1.38 3.62,1.38 3.5,1.5 3.38,1.5 3.25,1.62 3.12,1.62 3.12,1.75 3,1.75 1.62,3.12 1.62,3.25 1.5,3.38 1.5,3.5 1.25,3.75 1.25,3.88 1.12,4 1.12,4.12 1,4.12 1,4.38 0.88,4.5 0.88,4.75 0.75,4.88 0.75,5.12 0.62,5.25 0.62,5.5 0.5,5.62 0.5,6.62 0.38,6.75 0.38,10.25 7.25,10.25 7.38,10.38 7.38,10.62 7.5,10.62 7.5,10.5 7.62,10.38 7.75,10.38 7.75,10.5 7.88,10.5 7.88,10.38 8,10.38 8,10.75 8.12,10.88 8.12,11 8,11.12 8,11.5 7.88,11.5 7.88,11.38 7.75,11.38 7.62,11.5 7.5,11.5 7.5,11.38 7.38,11.38 7.38,23.62 7.5,23.62 7.5,23.5 7.75,23.5 7.75,23.62 7.88,23.62 7.88,23.5 8,23.5 8,23.88 8.12,24 8.12,24.12 8,24.25 8,24.62 7.88,24.62 7.88,24.5 7.75,24.5 7.62,24.62 7.5,24.62 7.5,24.38 7.38,24.38 7.38,24.62 7.25,24.75 0.38,24.75 0.38,25.75 0.5,25.88 0.5,26.5 0.38,26.62 0.38,28.25 0.5,28.38 0.5,29.38 0.62,29.5 0.62,29.75 0.75,29.88 0.75,30.12 0.88,30.25 0.88,30.5 1,30.62 1,30.75 1.12,30.88 1.12,31 1.38,31.25 1.38,31.38 1.5,31.5 1.5,31.62 1.75,31.88 1.75,32 3.12,33.38 3.25,33.38 3.38,33.5 3.5,33.5 3.62,33.62 3.75,33.62 3.75,33.75 3.88,33.75 4,33.88 4.12,33.88 4.12,34 4.38,34 4.5,34.12 4.75,34.12 4.88,34.25 5.12,34.25 5.25,34.38 5.5,34.38 5.62,34.5 6.62,34.5 6.75,34.62 17.75,34.62 17.75,33.12 17.88,33.12 17.88,34.62 18,34.62 18,33.62 18.12,33.5 18.5,33.5 18.5,32.5 18.38,32.5 18.38,32.75 18.25,32.75 18.25,32.5 18.12,32.5 18,32.62 18,33.5 18.12,33.62 18.12,33.75 18.25,33.75 18.25,33.62 18.38,33.62 18.38,33.75 18.5,33.75 18.5,33.62 18.62,33.5 18.62,32.38 18.75,32.38 18.75,33.5 18.88,33.62 19,33.62 19,33.75 19.12,33.75 19.12,33.62 19.25,33.62 19.25,34.62 19.38,34.62 19.38,33.25 19.25,33.12 19.25,32.62 19.38,32.62 19.38,32.75 19.5,32.88 19.5,34.62 26.5,34.62 26.5,34.38 26.38,34.25 26.38,33.12 26.5,33.12 26.5,33.5 26.62,33.62 26.62,34.25 26.75,34.38 26.75,34.62 27.75,34.62 27.75,34.38 27.88,34.25 27.88,33.75 27.75,33.75 27.75,33.62 27.62,33.62 27.62,33.75 27.5,33.75 27.5,32.75 27.62,32.62 27.62,32.5 27.75,32.5 27.75,32.62 28,32.62 28,32.75 28.12,32.88 28.12,34.62 28,34.62 28,33 27.88,33 27.75,32.88 27.75,32.75 27.62,32.75 27.5,32.62 27.5,32.38 27.38,32.25 27.25,32.25 27.12,32.38 27.12,32.62 27,32.62 27,32.5 26.88,32.5 26.88,32.88 26.75,32.88 26.75,32.62 26.62,32.62 26.62,33.5 26.75,33.62 26.75,33.75 26.88,33.75 26.88,33.62 27,33.62 27,33.75 27.12,33.75 27.12,33.62 27.25,33.5 27.25,32.38 27.38,32.38 27.38,33.62 J4.SH1
  Top 0.127: v12.62,6.38 12.62,6.5 12.5,6.62 12.62,6.75 12.75,6.75 12.75,7.5 12.62,7.62 12.5,7.5 12.5,7.38 12.62,7.25 12.62,7 12.25,7 12.12,6.88 12.12,6.38 12,6.38 12,6.88 11.88,7 11.88,7.12 12,7.25 12.12,7.25 12.25,7.12 12.38,7.12 12.62,7.38 12.62,7.5 12.75,7.62 15.25,7.62 15.25,7.5 15.38,7.38 16.88,7.38 16.88,7.5 17,7.62 17,8.5 16.88,8.62 15.38,8.62 15.38,8.5 15.25,8.38 13.88,8.38 13.75,8.5 13.75,9.62 13.62,9.62 13.62,9.12 13.25,9.12 13.25,9 13.12,8.88 13.12,8.38 13.25,8.38 13.25,8.5 13.38,8.5 13.38,8.38 13.5,8.38 13.5,8.5 13.62,8.5 13.62,8.38 13.75,8.38 13.88,8.5 13.88,9.5 14,9.62 14,10.12 13.88,10.25 13.88,11.25 14,11.25 14,11 14.12,11 14.12,10.5 14.25,10.5 14.25,10.62 14.38,10.62 14.38,10.5 14.5,10.38 14.5,9.88 14.62,9.88 14.62,10.38 14.75,10.5 14.75,10.62 14.88,10.62 14.88,10.5 15,10.5 15,10.62 15.12,10.62 15.12,10.5 15.25,10.38 15.25,10 15.12,9.88 15,9.88 15,10.12 15.12,10.12 15.12,10.38 15.25,10.5 15.25,11.25 15.38,11.25 15.38,11 15.5,10.88 16.88,10.88 16.88,11 17,11.12 17,12.12 16.88,12.25 15.5,12.25 15.38,12.12 15.38,11.88 15.12,11.88 15.12,12 15,12.12 14.88,12.12 14.88,12.5 15.12,12.5 15.12,13.5 15,13.62 14.88,13.5 14.88,13.38 15,13.38 15,12.62 14.88,12.62 14.88,13 14.62,13 14.62,12.88 14.5,12.75 14.38,12.75 14.38,12.25 14.25,12.12 14.12,12.12 14,12.25 14,12.38 13.88,12.5 13.88,12.75 13.75,12.75 13.75,12.38 13.88,12.25 13.75,12.12 13.75,11.88 14,11.88 14,12.12 14.12,12.25 14.12,12.38 14.25,12.38 14.25,12.5 14,12.5 14,13 14.25,13 14.25,13.12 14.5,13.12 14.5,13.25 14.38,13.38 13.25,13.38 EPD_C8.1
  Top 0.127: X1.4 42.5,27.12 42.5,28 42.62,28 42.62,27.25 42.75,27.12 43.12,27.12 43.12,27 43.25,26.88 43.38,27 43.38,27.25 43.25,27.25 43.25,27 43.38,26.88 43.5,27 43.5,27.12 43.62,27.25 43.62,28.12 43.5,28.25 43.38,28.25 43.38,28.38 43.25,28.38 43.25,28.25 43.12,28.25 43.12,28.38 43,28.38 43,28.25 42.88,28.25 42.88,28.38 42.62,28.38 42.62,28.25 42.5,28.25 42.5,28.38 42.38,28.38 42.38,28.25 42.25,28.25 42.25,28.38 42.12,28.38 42.12,28.25 42,28.25 42,28.38 41.88,28.38 41.88,28.25 41.75,28.25 41.75,28.38 41.62,28.38 41.62,28.25 41.5,28.25 41.5,28.38 41.38,28.38 41.38,28.25 41.25,28.25 41.25,28.38 41.12,28.38 41.12,28.25 41,28.25 41,28.38 40.88,28.38 40.88,28.25 40.75,28.25 40.62,28.12 40.62,27.62 40.75,27.62 40.75,27.88 42,27.88 42,28 42.12,28 42.12,27.88 42.38,27.88 42.38,27 42.5,26.88 42.62,26.88 42.75,27 43,27 43.25,26.75 43.25,26.38 43.12,26.38 43.12,26.5 43,26.5 43,26.38 41.38,26.38 41.38,25.75 X1.2 | v43.25,27.88 43.38,27.75 43.38,27.38 43.25,27.38 43.25,27.62 43.12,27.75 43.12,28 43,28 43,27.88 42.75,27.88 42.75,28 42.62,28.12 42.5,28.12 42.38,28 42.25,28 42.12,28.12 41,28.12 40.88,28 40.75,28 40.75,28.12 40.62,28.25 40.5,28.25 40.5,28.38 40.38,28.38 40.38,28.12 40.5,28.12 40.5,27.88 40.38,27.75 40.25,27.88 40.25,28.12 40.12,28.12 40,28.25 39.88,28.25 39.88,28.38 39.75,28.38 39.75,28.25 39.62,28.12 39.62,27.5 39.75,27.5 39.75,28.12 39.62,28.25 39.5,28.25 39.5,28.38 39.38,28.38 39.38,28.25 39.25,28.25 39.25,28.38 39.12,28.38 39.12,28.25 39,28.25 39,28.38 38.88,28.38 38.88,28.25 38.75,28.25 38.75,28.38 38.62,28.38 38.62,28.25 38.5,28.25 38.5,28.38 38.38,28.38 38.38,28.25 38.25,28.25 38.25,28.38 38.12,28.5 35.5,28.5 35.5,28.38 35.62,28.38 35.62,28.25 35.75,28.25 35.75,28.38 35.88,28.38 35.88,28.25 36,28.25 36,28.38 36.12,28.38 36.12,28.25 36.25,28.25 36.25,28.38 36.38,28.38 36.38,28.25 36.5,28.25 36.5,28.38 36.62,28.38 36.62,28.25 36.75,28.25 36.75,28.38 36.88,28.38 36.88,28.25 37,28.25 37,28.38 37.12,28.38 37.12,28.25 37.25,28.25 37.25,28.38 37.38,28.38 37.38,28.25 37.5,28.25 37.5,28.38 37.62,28.38 37.62,28.25 37.75,28.25 37.75,28.38 37.88,28.38 37.88,28.25 38,28.25 38,28.38 38.12,28.38 38.12,24.62 38.38,24.62 38.38,23.88 38.5,23.88 38.62,23.75 38.62,23.5 38.5,23.38 38.5,23 38.62,23 38.62,23.12 38.75,23.12 38.88,23.25 38.88,23.38 39,23.38 39.12,23.5 39.12,23.62 39.25,23.62 39.38,23.75 39.38,23.88 39.5,23.88 39.62,24 39.62,24.12 39.75,24.12 39.88,24.25 39.88,26.75 39.75,26.88 39.75,27.38 39.88,27.5 39.88,28.12 40,28.12 40,28 40.12,27.88 40.12,27.75 C1.2